# Altium PCB Плата.PcbDoc (part 2 of 2)
Units mm, origin at the board's own origin, x right, y up, seen from the top; angles counter-clockwise.
Board outline 114.75 x 89.87 mm, 2 copper layers (Top Layer, Bottom Layer); 69 components, 75 nets, 338 pads, 343 vias.
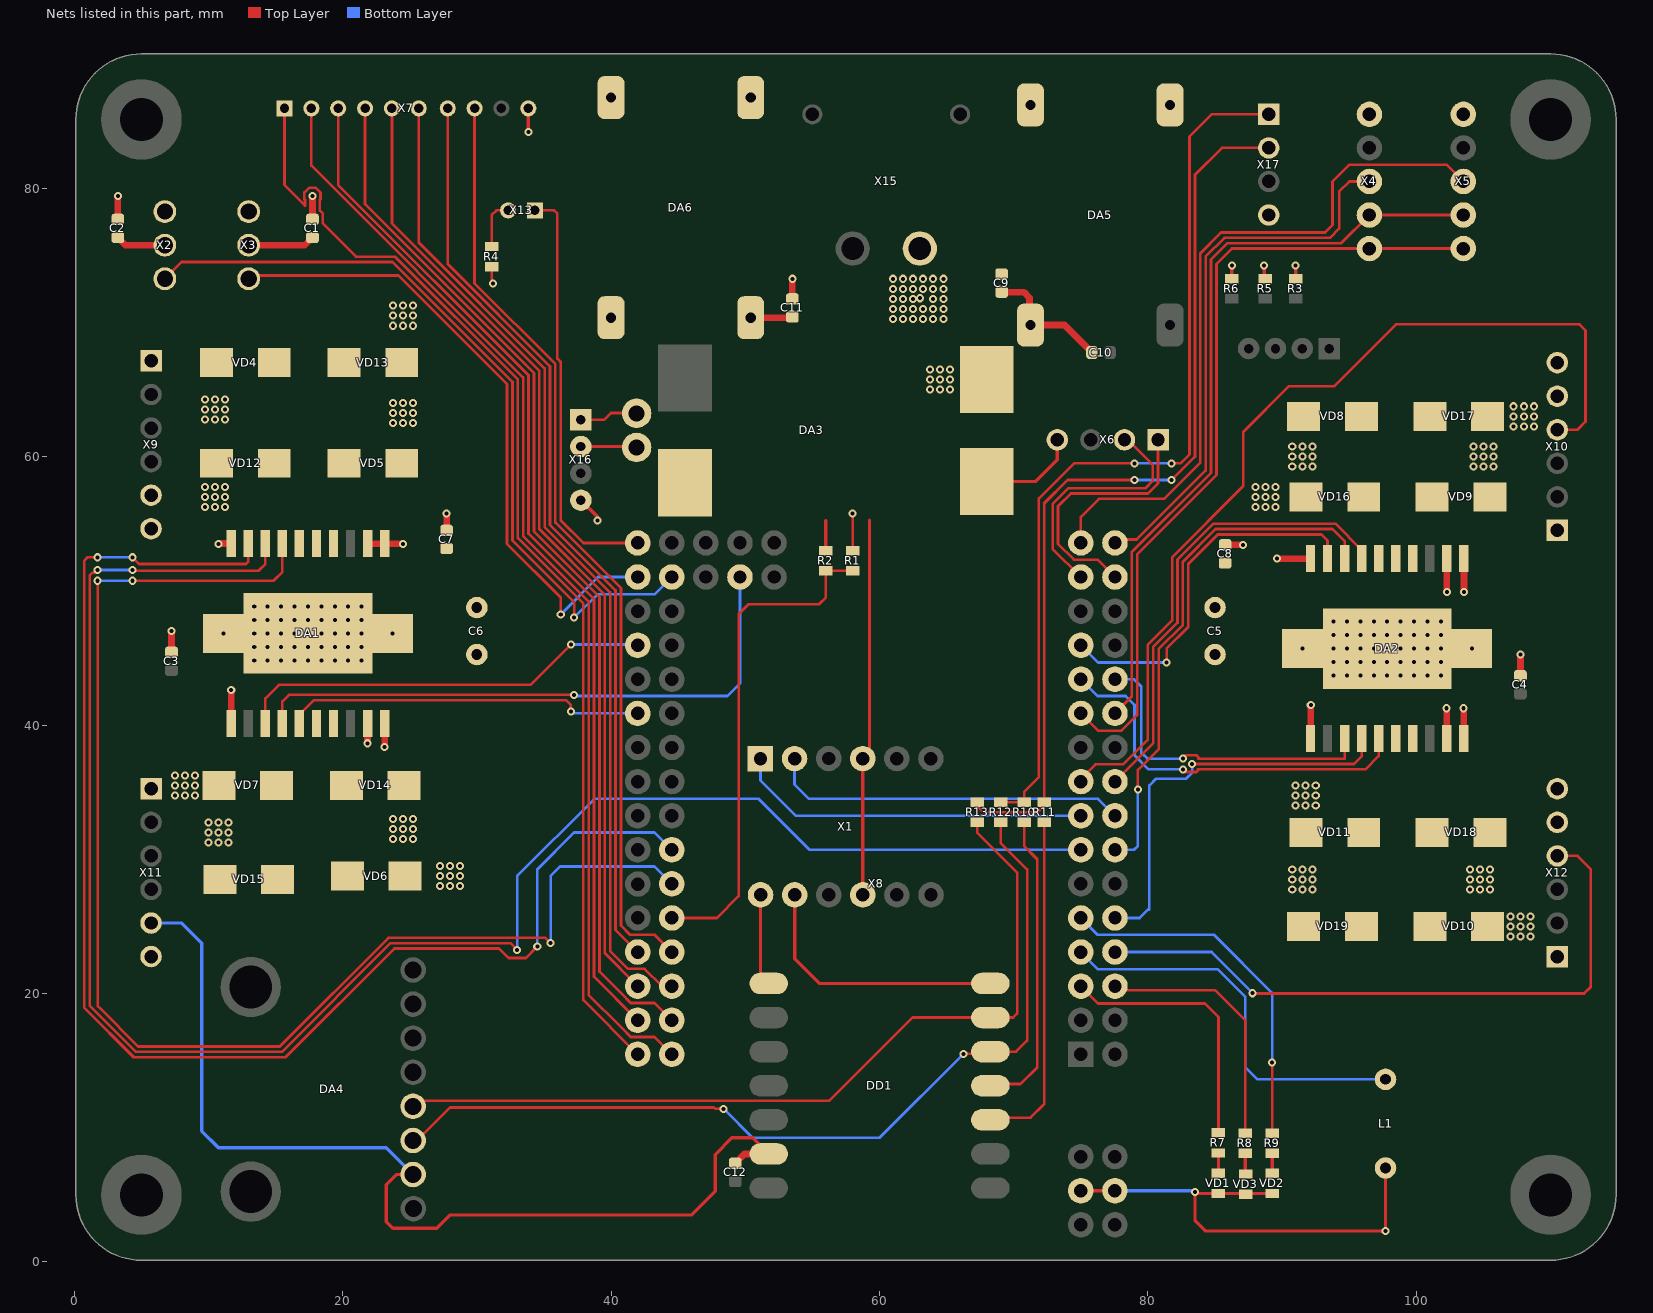
[diagram p2: the nets of this part, all layers, seen from the top]

## Via types
v1: diameter 0.6, hole 0.3, Top Layer to Bottom Layer, tented both sides, 342 vias
v2: diameter 0.6, hole 0.3, Top Layer to Bottom Layer, 1 vias

## Nets (pads, with @x,y where several pads share a name; then routed paths per layer and width w, separated by ;. In a path a pad name is that pad's centre, name@x,y a point inside that pad or via, vN(x,y) a via of type N, cw(c..) or ccw(c..) an arc to the next point about the centre after c; other vN are vias at no path point) (continued)
ENC2C: X8.17 X10.4 | length 70.4
  Top Layer w0.2: X8.17@75.002,35.787 75.002,36.002 76.077,37.077 78.143,37.077 79.992,38.926 79.992,45.989 81.8,47.797 81.8,52.497 87.1,57.797 87.1,61.833 90.517,65.25 93.886,65.25 98.486,69.85 112.15,69.85 112.6,69.4 112.6,62.6 112,62 X10.4@110.502,62
ENC2D: X8.8 X12.4 | length 48.6
  Top Layer w0.2: v1(87.787,20.018) 87.805,20 112.5,20 113,20.5 113,29.25 112,30.25 X12.4@110.502,30.25
  Bottom Layer w0.2: X8.8@77.542,23.087 84.747,23.087 87.787,20.047 v1(87.787,20.018)
GND: C1.2 C2.2 C3.2 C4.2 C5.2 C6.2 C7.1 C8.1 C9.1 C10.1 C11.1 C12.1 DA1.1 DA1.2 DA1.10 DA1.11 DA1.19 DA1.20 DA2.1 DA2.2 DA2.10 DA2.11 DA2.19 DA2.20 DA3.3 DA4.2 DA5.1 DA5.4 DA6.1 DA6.4 DD1.13 L1.2 R2.2 R3.1 R4.2 R5.1 R6.1 VD1.2 VD2.2 VD3.2 VD6.2 VD7.2 VD10.2 VD11.2 VD12.2 VD13.2 VD16.2 VD17.2 X1.4 X1.10 X2.3 X3.3 X4.5 X5.5 X6.4 X7.10 X8.73 X8.74 X9.5 X10.5 X11.5 X12.5 X15.2 X16.4 X17.4 | length 202.7
  Top Layer w0.2: R4.2@31.1,74.15 31.1,73 v1(31.2,72.9)
  Top Layer w0.25: DA4.2@25.25,6.51 24.01,6.51 23.25,5.75 23.25,3 23.75,2.5 27,2.5 28,3.5 46,3.5 47.75,5.25 47.75,8 49,9.25 50.544,9.25 DD1.13@51.747,8.047 ; v1(33.83,84.2) X7.10@33.83,85.95 ; X16.4@37.75,56.75 39,55.5 v2(39,55.25) ; R2.2@56,53 56,55.238 ; X1.10@58.755,27.345 58.755,37.495 X1.4@58.75,37.5 59.25,38 59.25,55.25 ; DA3.3@68,58.15 71.65,58.15 73.25,59.75 X6.4@73.25,61.25 ; DA5.4@71.175,69.875 DA5.4@71.25,69.8 ; X8.74@74.997,5.307 X8.73@77.537,5.307 ; v1@83.5,5.1 83.5,3.1 84.3,2.3 v1(97.7,2.3) L1.2@97.7,7 ; v1(83.5,5.2) 83.6,5.1 VD1.2@85.25,5.1 VD2.2@89.25,5.1 ; R6.1@86.25,73.25 v1(86.25,74.25) ; R5.1@88.658,73.242 v1(88.658,74.242) ; R3.1@91,73.25 v1(91,74.25)
  Top Layer w0.5: C2.2@3.25,77.675 v1(3.25,79.425) ; C3.2@7.25,45.425 v1(7.25,47) ; v1(10.75,53.5) 10.773,53.523 DA1.10@11.699,53.523 ; DA1.11@11.699,40.123 v1(11.699,42.623) ; C1.2@17.75,77.675 v1(17.75,79.425) ; v1(21.859,38.641) DA1.19@21.859,40.123 ; DA1.2@21.859,53.523 21.882,53.5 v1(24.5,53.5) ; v1(23.129,38.379) DA1.20@23.129,40.123 ; C7.1@27.75,54.5 v1(27.75,55.75) ; C12.1@49.25,7.35 49.947,8.047 DD1.13@51.747,8.047 ; C11.1@53.5,71.75 v1(53.5,73.25) ; C9.1@69.1,72.25 70.75,72.25 71.175,71.825 DA5.4@71.175,69.875 ; DA5.4@71.25,69.8 73.775,69.8 C10.1@75.825,67.75 ; C8.1@85.75,53.425 v1(87.075,53.425) ; v1(89.61,52.4) DA2.10@92.11,52.4 ; DA2.11@92.13,39 v1(92.13,41.5) ; DA2.19@102.25,39 102.26,39.01 102.26,41.24 v1(102.25,41.25) ; v1(102.27,49.9) DA2.2@102.27,52.4 ; DA2.20@103.5,39 103.519,39.019 103.519,41.231 v1(103.5,41.25) ; v1(103.54,49.9) DA2.1@103.54,52.4 ; C4.2@107.75,43.675 v1(107.75,45.25)
  Bottom Layer w0.25: X11.5@5.725,25.25 8,25.25 9.5,23.75 9.5,9.75 10.75,8.5 23.26,8.5 DA4.2@25.25,6.51 ; X8.73@77.537,5.307 83.393,5.307 v1(83.5,5.2)
  other v1: 107,24.25 107.75,24.25 108.5,24.25 107,25 107.75,25 108.5,25 107,25.75 107.75,25.75 108.5,25.75 27.25,28 28,28 28.75,28 27.25,28.75 28,28.75 28.75,28.75 27.25,29.5 28,29.5 28.75,29.5 91,34 91.75,34 92.5,34 7.5,34.75 8.25,34.75 9,34.75 91,34.75 91.75,34.75 92.5,34.75 7.5,35.5 8.25,35.5 9,35.5 91,35.5 91.75,35.5 92.5,35.5 7.5,36.25 8.25,36.25 9,36.25 93.825,43.7 94.825,43.7 95.825,43.7 96.825,43.7 97.825,43.7 98.825,43.7 99.825,43.7 100.825,43.7 101.825,43.7 93.825,44.7 94.825,44.7 95.825,44.7 96.825,44.7 97.825,44.7 98.825,44.7 99.825,44.7 100.825,44.7 101.825,44.7 13.414,44.823 14.414,44.823 15.413,44.823 16.414,44.823 17.414,44.823 18.414,44.823 19.414,44.823 20.413,44.823 21.414,44.823 91.525,45.7 93.825,45.7 94.825,45.7 95.825,45.7 96.825,45.7 97.825,45.7 98.825,45.7 99.825,45.7 100.825,45.7 101.825,45.7 104.125,45.7 13.414,45.823 14.414,45.823 15.413,45.823 16.414,45.823 17.414,45.823 18.414,45.823 19.414,45.823 20.413,45.823 21.414,45.823 93.825,46.7 94.825,46.7 95.825,46.7 96.825,46.7 97.825,46.7 98.825,46.7 99.825,46.7 100.825,46.7 101.825,46.7 11.114,46.823 13.414,46.823 14.414,46.823 15.413,46.823 16.414,46.823 17.414,46.823 18.414,46.823 19.414,46.823 20.413,46.823 21.414,46.823 23.714,46.823 93.825,47.7 94.825,47.7 95.825,47.7 96.825,47.7 97.825,47.7 98.825,47.7 99.825,47.7 100.825,47.7 101.825,47.7 13.414,47.823 14.414,47.823 15.413,47.823 16.414,47.823 17.414,47.823 18.414,47.823 19.414,47.823 20.413,47.823 21.414,47.823 13.414,48.823 14.414,48.823 15.413,48.823 16.414,48.823 17.414,48.823 18.414,48.823 19.414,48.823 20.413,48.823 21.414,48.823 9.75,56.25 10.5,56.25 11.25,56.25 88,56.25 88.75,56.25 89.5,56.25 9.75,57 10.5,57 11.25,57 88,57 88.75,57 89.5,57 9.75,57.75 10.5,57.75 11.25,57.75 88.025,57.75 88.75,57.75 89.5,57.75 107.25,62.25 108,62.25 108.75,62.25 107.25,63 108,63 108.75,63 107.25,63.75 108,63.75 108.75,63.75 23.75,69.75 24.5,69.75 25.25,69.75 61,70.25 61.75,70.25 62.5,70.25 63.25,70.25 64,70.25 64.75,70.25 23.75,70.5 24.5,70.5 25.25,70.5 61,71 61.75,71 62.5,71 63.25,71 64,71 64.75,71 23.75,71.25 24.5,71.25 25.25,71.25 61,71.75 61.75,71.75 62.5,71.75 64,71.75 64.75,71.75 63,71.8 61,72.5 61.75,72.5 62.5,72.5 63.25,72.5 64,72.5 64.75,72.5 61,73.25 61.75,73.25 62.5,73.25 63.25,73.25 64,73.25 64.75,73.25
LED: X8.47 X13.1 | length 31.2
  Top Layer w0.2: X13.1@34.325,78.35 35.75,78.35 36,78.1 36,67.307 36.25,67.057 36.25,55.25 37.933,53.567 X8.47@41.982,53.567
LED1: R7.2 X8.5 | length 19.8
  Top Layer w0.2: X8.5@75.002,20.547 76.292,19.257 84.243,19.257 85.25,18.25 R7.2@85.25,9.616
LED2: R8.2 X8.6 | length 19.2
  Top Layer w0.2: X8.6@77.542,20.547 77.839,20.25 85,20.25 87.25,18 87.25,10.839 R8.2@87.25,9.6
LED3: R9.2 X8.9 | length 27
  Top Layer w0.2: R9.2@89.25,9.6 v1(89.25,14.85)
  Bottom Layer w0.2: X8.9@75.002,25.627 76.252,24.377 84.923,24.377 89.25,20.05 v1(89.25,14.85)
LSesn1: X7.1 X8.55 | length 86.1
  Top Layer w0.2: X7.1@15.67,85.95 15.67,80.23 17.2,78.7 17.2,79.126 17.15,79.176 17.15,79.674 17.501,80.025 17.999,80.025 18.35,79.674 18.35,79.176 18.3,79.126 18.3,78.325 18.525,78.1 18.525,77.375 21,74.9 23.881,74.9 33.05,65.731 33.05,53.925 37.932,49.043 37.932,19.517 X8.55@41.982,15.467
LSesn2: X7.2 X8.56 | length 82.6
  Top Layer w0.2: X7.2@17.67,85.95 17.67,81.677 33.45,65.897 33.45,54.09 38.332,49.208 38.332,19.889 40.732,17.489 41.464,16.757 43.232,16.757 X8.56@44.522,15.467
LSesn3: X7.3 X8.57 | length 77.2
  Top Layer w0.2: X7.3@19.67,85.95 19.67,80.243 33.85,66.063 33.85,54.256 38.732,49.374 38.732,21.257 X8.57@41.982,18.007
LSesn4: X7.4 X8.58 | length 78.4
  Top Layer w0.2: X7.4@21.67,85.95 21.67,78.808 34.25,66.228 34.25,54.422 39.132,49.54 39.132,21.629 40.732,20.029 41.464,19.297 43.232,19.297 X8.58@44.522,18.007
LSesn5: X7.5 X8.59 | length 73
  Top Layer w0.2: X7.5@23.67,85.95 23.67,77.374 34.65,66.394 34.65,54.587 39.532,49.705 39.532,22.997 X8.59@41.982,20.547
LSesn6: X7.6 X8.60 | length 74.4
  Top Layer w0.2: X7.6@25.67,85.95 25.67,75.94 35.05,66.56 35.05,54.753 39.932,49.871 39.932,23.163 41.258,21.837 42.5,21.837 43.79,20.547 X8.60@44.522,20.547
LSesn7: X7.7 X8.61 | length 68.7
  Top Layer w0.2: X7.7@27.83,85.95 27.83,74.345 35.45,66.725 35.45,54.919 40.332,50.037 40.332,24.737 X8.61@41.982,23.087
LSesn8: X7.8 X8.62 | length 70
  Top Layer w0.2: X7.8@29.83,85.95 29.83,72.911 35.85,66.891 35.85,55.084 40.732,50.202 40.732,25.067 41.422,24.377 43.232,24.377 X8.62@44.522,23.087
MOT1A: DA1.4 VD5.2 VD13.1 X9.1
MOT1B: DA1.16 VD7.1 VD15.2 X11.1
MOT1C: DA2.4 VD9.2 VD17.1 X10.1
MOT1D: DA2.16 VD11.1 VD19.2 X12.1
MOT2A: DA1.5 VD4.2 VD12.1 X9.6
MOT2B: DA1.17 VD6.1 VD14.2 X11.6
MOT2C: DA2.5 VD8.2 VD16.1 X10.6
MOT2D: DA2.17 VD10.1 VD18.2 X12.6
MotEn1A: DA1.8 X8.13 | length 135.4
  Top Layer w0.2: v1(1.75,51.55) 1.75,51.5 1.6,51.35 1.35,51.35 1.15,51.15 1.15,19.1 4.6,15.65 15.478,15.65 23.578,23.75 32.5,23.75 v1(33,23.25) ; v1(4.35,51.55) 4.4,51.5 13.75,51.5 14.239,51.989 DA1.8@14.239,53.523
  Bottom Layer w0.2: v1(1.75,51.55) v1(4.35,51.55) ; v1(33,23.25) 33,28.75 38.75,34.5 51,34.5 54.793,30.707 X8.13@75.002,30.707
MotEn1B: DA2.8 X8.14 | length 39.1
  Top Layer w0.2: v1(79.25,35.187) 79.25,36.65 80.792,38.192 80.792,45.658 82.6,47.466 82.6,52.166 85.034,54.6 93.75,54.6 94.65,53.7 DA2.8@94.65,52.4
  Bottom Layer w0.2: X8.14@77.542,30.707 78.957,30.707 79.25,31 v1(79.25,35.187)
MotEn2A: DA1.14 X8.52 | length 44.3
  Top Layer w0.2: DA1.14@15.509,40.123 15.509,41.759 16,42.25 v1(37.25,42.25)
  Bottom Layer w0.2: v1(37.25,42.25) 37.343,42.157 48.657,42.157 49.602,43.102 X8.52@49.602,51.027
MotEn2B: DA2.14 X8.10 | length 30.5
  Top Layer w0.2: v1@83.193,37.1 95.35,37.1 95.92,37.67 DA2.14@95.92,39
  Bottom Layer w0.2: X8.10@77.542,25.627 79.377,25.627 80,26.25 ; 80.1,26.25 80.1,35.5 80.6,36 82.85,36 83.293,36.443 v1(83.293,37.1)
MotIn1A: DA1.7 X8.66 | length 101.2
  Top Layer w0.2: v1(1.75,50.75) 1.75,19.066 1.95,18.866 4.766,16.05 15.313,16.05 23.413,24.15 35.1,24.15 v1(35.5,23.75) ; v1(4.35,50.75) 14.85,50.75 15.509,51.409 DA1.7@15.509,53.523
  Bottom Layer w0.2: v1(1.75,50.75) v1(4.35,50.75) ; v1(35.5,23.75) 35.5,28.75 36.207,29.457 43.232,29.457 X8.66@44.522,28.167
MotIn1B: DA2.7 X8.18 | length 34.8
  Top Layer w0.2: X8.18@77.542,35.787 80.392,38.637 80.392,45.823 82.2,47.631 82.2,52.331 84.869,55 93.97,55 95.92,53.05 DA2.7@95.92,52.4
MotIn2A: DA1.9 X8.68 | length 104
  Top Layer w0.2: v1(1.75,52.5) 1,52.5 0.75,52.25 0.75,18.934 4.434,15.25 15.75,15.25 23.85,23.35 31.65,23.35 32.35,22.65 33.65,22.65 v1(34.5,23.5) ; v1(4.35,52.5) 4.35,52.49 4.84,52 12.8,52 12.969,52.168 DA1.9@12.969,53.523
  Bottom Layer w0.2: v1(1.75,52.5) v1(4.35,52.5) ; v1(34.5,23.5) 34.5,29.25 37.247,31.997 43.232,31.997 X8.68@44.522,30.707
MotIn2B: DA2.9 X8.25 | length 27.8
  Top Layer w0.2: v1(81.392,44.661) 81.392,45.692 83,47.3 83,52 85.2,54.2 92.934,54.2 93.38,53.754 DA2.9@93.38,52.4
  Bottom Layer w0.2: X8.25@75.002,45.947 76.292,44.657 81.243,44.657 81.3,44.6 81.331,44.6 v1(81.392,44.661)
MotIn3A: DA1.13 X8.41 | length 31.3
  Top Layer w0.2: DA1.13@14.239,40.123 14.239,41.988 15.25,43 34,43 v1(37,46)
  Bottom Layer w0.2: v1(37,46) 41.929,46 X8.41@41.982,45.947
MotIn3B: DA2.13 X8.24 | length 24.2
  Top Layer w0.2: v1(82.6,37.5) 82.85,37.75 83.6,37.75 83.85,37.5 ; 83.75,37.5 94.65,37.5 DA2.13@94.65,39
  Bottom Layer w0.2: X8.24@77.542,43.407 78.953,43.407 79.5,42.86 79.5,37.86 ; 79.6,37.86 79.96,37.5 v1(82.6,37.5)
MotIn4A: DA1.15 X8.37 | length 27
  Top Layer w0.2: DA1.15@16.779,40.123 16.779,40.773 17.855,41.85 36.65,41.85 37,41.5 v1(37,41)
  Bottom Layer w0.2: v1(37,41) 37.133,40.867 X8.37@41.982,40.867
MotIn4B: DA2.15 X8.23 | length 29
  Top Layer w0.2: v1(82.6,36.7) 82.8,36.5 83.6,36.5 83.8,36.7 ; 83.7,36.7 96.2,36.7 97.19,37.69 DA2.15@97.19,39
  Bottom Layer w0.2: X8.23@75.002,43.407 76.252,42.157 78.343,42.157 79,41.5 79,37.75 80.05,36.7 ; 80.15,36.7 v1(82.6,36.7)
NetDA3_4: DA3.4 X16.1 | length 4.4
  Top Layer w0.2: X16.1@37.75,62.75 39.5,62.75 40,63.25 41.87,63.25 DA3.4@41.9,63.22
NetDA3_5: DA3.5 X16.2 | length 4.2
  Top Layer w0.2: X16.2@37.75,60.75 41.83,60.75 DA3.5@41.9,60.68
NetR4_1: R4.1 X13.2 | length 3.7
  Top Layer w0.2: R4.1@31.1,75.65 31.1,78 31.45,78.35 X13.2@32.325,78.35
NetR7_1: R7.1 VD1.1 | length 1.5
  Top Layer w0.25: VD1.1@85.25,6.6 R7.1@85.25,8.116
NetR8_1: R8.1 VD3.1 | length 1.5
  Top Layer w0.25: VD3.1@87.25,6.6 R8.1@87.25,8.1
NetR9_1: R9.1 VD2.1 | length 1.5
  Top Layer w0.25: VD2.1@89.25,6.6 R9.1@89.25,8.1
NetR10_1: R10.1 R12.1 X17.1 | length 67.7
  Top Layer w0.2: R12.1@69.023,34.25 R10.1@70.773,34.25 70.773,35.023 71.873,36.123 71.873,56.873 74.5,59.5 v1(79,59.5) ; v1(81.75,59.5) 82.434,59.5 83.1,60.166 83.1,83.85 84.75,85.5 X17.1@89,85.5
  Bottom Layer w0.2: v1(79,59.5) v1(81.75,59.5)
NetR11_1: R11.1 R13.1 X17.2 | length 68.2
  Top Layer w0.2: R13.1@67.273,34.25 67.273,33.977 67.75,33.5 71.75,33.5 72.273,34.023 R11.1@72.273,34.25 72.273,56.523 74,58.25 v1(79,58.25) ; v1@81.758,58.258 83.5,60 83.5,81 85.5,83 X17.2@89,83
  Bottom Layer w0.2: v1(79,58.25) 79.003,58.253 81.74,58.253 v1(81.743,58.257)
RX: X1.2 X8.16 | length 26.8
  Bottom Layer w0.2: X1.2@53.67,37.5 53.67,35.58 54.75,34.5 76.289,34.5 X8.16@77.542,33.247
RX_nRF: DD1.8 X1.7 | length 6.9
  Top Layer w0.25: X1.7@51.135,27.345 51.135,21.359 DD1.8@51.747,20.747
SCL: X4.2 X5.2 X8.22 | length 57
  Top Layer w0.2: X8.22@77.542,40.867 78.792,42.117 78.792,52.883 84.7,58.791 84.7,74.677 85.923,75.9 94.4,75.9 X4.2@96.5,78 X5.2@103.5,78
SCL_nRF: DA4.4 DD1.6 R13.2 | length 63.3
  Top Layer w0.2: DA4.4@25.25,11.59 25.66,12 56.25,12 62.457,18.207 DD1.6@68.257,18.207 69.957,18.207 70.25,18.5 70.25,29 67.273,31.977 R13.2@67.273,32.75
SCL_Soft: X6.2 X8.29 | length 18.6
  Top Layer w0.2: X8.29@75.002,51.027 72.9,53.129 72.9,56.466 74.084,57.65 79.834,57.65 80.35,58.166 80.35,59.4 78.5,61.25 X6.2@78.25,61.25
SDA: X4.1 X5.1 X8.21 | length 60.1
  Top Layer w0.2: X8.21@75.002,40.867 76.292,39.577 78.02,39.577 79.192,40.749 79.192,52.717 85.1,58.625 85.1,74.35 86.25,75.5 X4.1@96.5,75.5 X5.1@103.5,75.5
SDA_nRF: DA4.3 DD1.5 R12.2 | length 68.2
  Top Layer w0.2: DA4.3@25.25,9.05 25.55,9.05 28,11.5 47.666,11.5 47.766,11.4 v1(48.366,11.4) ; v1(66.25,15.5) 67.09,15.5 67.59,15 DD1.5@68.257,15.667 70.167,15.667 71,16.5 71,29.25 69.023,31.227 R12.2@69.023,32.75
  Bottom Layer w0.2: v1(48.366,11.4) 48.397,11.4 50.547,9.25 60,9.25 v1(66.25,15.5)
SDA_Soft: X6.1 X8.30 | length 19.5
  Top Layer w0.2: X8.30@77.542,51.027 76.252,52.317 74.484,52.317 73.3,53.501 73.3,56.3 74.25,57.25 80,57.25 80.75,58 X6.1@80.75,61.25
ServoA: X2.1 X8.46 | length 58.1
  Top Layer w0.2: X2.1@6.75,73.25 8,74.5 23.716,74.5 32.65,65.566 32.65,53.759 37.25,49.159 v1(37.25,48)
  Bottom Layer w0.2: v1(37.25,48) 38.987,49.737 43.232,49.737 X8.46@44.522,51.027
ServoB: X3.1 X8.45 | length 48.4
  Top Layer w0.2: X3.1@13,73.25 13.25,73.5 24.15,73.5 32.25,65.4 32.25,53.5 36.25,49.5 v1(36.25,48.25)
  Bottom Layer w0.2: v1(36.25,48.25) 39.027,51.027 X8.45@41.982,51.027
SoftRX_nRF: DD1.4 R10.2 | length 22.7
  Top Layer w0.2: DD1.4@68.257,13.127 68.38,13.25 70.5,13.25 71.75,14.5 71.75,30 70.773,30.977 R10.2@70.773,32.75
SoftTX_nRF: DD1.3 R11.2 | length 25.5
  Top Layer w0.2: DD1.3@68.257,10.587 68.42,10.75 71.25,10.75 72.273,11.773 R11.2@72.273,32.75
Sound: L1.1 X8.7 | length 29.5
  Bottom Layer w0.2: X8.7@75.002,23.087 76.292,21.797 85.203,21.797 87.25,19.75 87.25,14.5 88.15,13.6 L1.1@97.5,13.6
TX: X1.1 X8.15 | length 26.6
  Bottom Layer w0.2: X1.1@51.13,37.5 51.13,35.87 53.753,33.247 X8.15@75.002,33.247
TX_nRF: DD1.7 X1.8 | length 20.1
  Top Layer w0.25: X1.8@53.675,27.345 53.675,22.575 55.503,20.747 DD1.7@68.257,20.747
Vcc: C5.1 C6.1 C7.2 C8.2 C9.2 DA1.6 DA2.6 DA3.2 DA5.2 DA6.2 R1.1 VD4.1 VD5.1 VD8.1 VD9.1 VD14.1 VD15.1 VD18.1 VD19.1 | length 3.1
  Top Layer w0.2: R1.1@58,53 v1(58,55.75)
  Top Layer w0.5: VD18.1@105.25,31.775 VD18.1@105.475,32
  other v1: 90.75,27.75 91.5,27.75 92.25,27.75 104,27.75 104.75,27.75 105.5,27.75 90.75,28.5 91.5,28.5 92.25,28.5 104,28.5 104.75,28.5 105.5,28.5 90.75,29.25 91.5,29.25 92.25,29.25 104,29.25 104.75,29.25 105.5,29.25 10,31.25 10.75,31.25 11.5,31.25 23.75,31.5 24.5,31.5 25.25,31.5 10,32 10.75,32 11.5,32 23.75,32.25 24.5,32.25 25.25,32.25 10,32.75 10.75,32.75 11.5,32.75 23.75,33 24.5,33 25.25,33 90.75,59.25 91.5,59.25 92.25,59.25 104.25,59.25 105,59.25 105.75,59.25 90.75,60 91.5,60 92.25,60 104.25,60 105,60 105.75,60 90.75,60.75 91.5,60.75 92.25,60.75 104.25,60.75 105,60.75 105.75,60.75 23.75,62.5 24.5,62.5 25.25,62.5 9.75,62.75 10.5,62.75 11.25,62.75 23.75,63.25 24.5,63.25 25.25,63.25 9.75,63.5 10.5,63.5 11.25,63.5 23.75,64 24.5,64 25.25,64 9.75,64.25 10.5,64.25 11.25,64.25 63.75,65 64.5,65 65.25,65 63.75,65.75 64.5,65.75 65.25,65.75 63.75,66.5 64.5,66.5 65.25,66.5
Voltage: R1.2 R2.1 X8.64 | length 37.7
  Top Layer w0.2: X8.64@44.522,25.627 47.877,25.627 49.505,27.255 49.505,48.255 50.25,49 55.5,49 56,49.5 R2.1@56,51.5 R1.2@58,51.5
Vs: C1.1 C2.1 C11.2 DA6.3 X2.2 X3.2 | length 11.8
  Top Layer w0.5: C2.1@3.25,76.325 3.825,75.75 X2.2@6.75,75.75 ; X3.2@13,75.75 17.175,75.75 C1.1@17.75,76.325 ; DA6.3@50.4,70.35 53.45,70.35 C11.2@53.5,70.4
XSHUT1: X4.3 X8.32 | length 41.1
  Top Layer w0.2: X8.32@77.542,53.567 77.795,53.82 79.163,53.82 84.3,58.957 84.3,74.914 85.686,76.3 93.55,76.3 94.25,77 94.25,79.75 95,80.5 X4.3@96.5,80.5
XSHUT2: X5.3 X8.31 | length 52.9
  Top Layer w0.2: X8.31@75.002,53.567 75.002,55.498 75,55.5 76.35,56.85 81.185,56.85 83.9,59.565 83.9,75.15 85.45,76.7 93.2,76.7 93.75,77.25 93.75,80.5 95,81.75 102.25,81.75 X5.3@103.5,80.5
pads on no net: DA1.3 DA1.18 DA2.3 DA2.18 DA4.5 DA4.6 DA4.7 DA4.8 DA4.9 DA4.10 DD1.1 DD1.2 DD1.9 DD1.10 DD1.11 X1.5 X1.6 X1.11 X1.12 X8.1 X8.2 X8.11 X8.12 X8.33 X8.34 X8.35 X8.36 X8.38 X8.39 X8.40 X8.42 X8.43 X8.44 X8.48 X8.49 X8.50 X8.51 X8.53 X8.54 X8.63 X8.69 X8.70 X8.71 X8.72 X15.3 X15.4

## Polygon pours and split planes (outlines as drawn)
+3S on Top Layer "+3S_L01_P034" (solid, pour order 34): 60.25,73.25 59,72 59,63.5 58,62.5 42.25,62.5 42,62.75 42,69 42.25,69.25 55.5,69.25 55.75,69.5 55.75,77 56.75,78 59.5,78 60.25,77.25
GND on Top Layer "GND_L01_P059" (solid, pour order 59): 65.75,77.25 65.75,69.5 64.75,68.5 63.75,68.5 62.5,67.25 62.5,62 63.5,61 70,61 70.5,60.5 70.5,55.75 70,55.25 69.95,55.2 43.55,55.2 43,55.75 43,60.5 43.5,61 58.25,61 59.25,62 59.25,72.25 60.25,73.25 60.25,77.25 61,78 65,78
Vcc on Top Layer "VCC_L01_P035" (solid, pour order 35): 63.25,63 62.75,63.5 62.75,67.5 63.75,68.5 64.75,68.5 65.75,69.5 65.75,78.75 64.75,79.75 39.75,79.75 38.25,81.25 38.25,88.5 39,89.25 43,89.25 43.75,88.5 43.75,85.25 44.75,84.25 68.75,84.25 69.5,85 69.5,88.5 70,89 72.583,89 73,88.375 73,82 70.25,79.25 70.25,63.75 69.5,63
Vcc on Top Layer "VCC_L01_P047" (solid, pour order 47): 85,51.75 85,52.5 86.5,52.5 86.5,51.5 87,51 96,51 96.5,51.5 96.5,53.75 98,53.75 98,51.25 95.75,49 88,49 86.25,47.25 84.25,47.25 83.5,48 83.5,50.25
GND on Top Layer "GND_L01_P045" (solid, pour order 45): 93.425,55.925 93,55.5 88,55.5 87.5,56 87.5,58 88,58.5 93,58.5 93.425,58.075
MOT2C on Top Layer "MOT2C_L01_P025" (solid, pour order 25): 97.25,54.75 97.75,54.25 97.75,51 99,51 99,65.5 99.5,66 109,66 109.25,65.75 111.5,65.75 111.75,66 111.75,68.25 111.25,68.75 97.75,68.75 94.5,65.5 94.5,55 94.75,54.75
MOT2D on Top Layer "MOT2D_L01_P022" (solid, pour order 22): 103.15,32.9 104,33.75 111.5,33.75 112,34.25 112,36.5 111.5,37 101,37 100.5,37.5 100.5,40.5 99,40.5 99,24 99.55,23.525 102.525,23.525 103.15,24.15
GND on Top Layer "GND_L01_P041" (solid, pour order 41): 103.5,26.25 103.75,26.5 108.75,26.5 109,26.25 109,23.75 108.75,23.5 103.75,23.5 103.5,23.75
MOT2A on Top Layer "MOT2A_L01_P032" (solid, pour order 32): 18.75,52 17.25,52 17.25,54.75 11,54.75 9.75,53.5 4.25,53.5 3.75,54 3.75,55.75 4.25,56.25 13.25,56.25 13.25,68.25 14,69 16.25,69 16.75,68.5 16.75,56.5 17.25,56 18.25,56 18.75,55.5
Vcc on Top Layer "VCC_L01_P055" (solid, pour order 55): 26.5,52 27,52.5 27,53.575 28.5,53.575 28.5,52.5 29,52 31,52 31.5,51.5 31.5,47.5 31,47 29,47 28.5,47.5 28.5,49.5 28,50 16.25,50 16,50.25 16,54.75 16.027,54.723 17.499,54.723 17.499,52.251 17.75,52
MOT2B on Top Layer "MOT2B_L01_P029" (solid, pour order 29): 21.25,38.75 22.5,37.5 22.5,26.5 17.25,21.25 4.5,21.25 4,21.75 4,23.5 4.5,24 7.25,24 9.75,26.5 16.5,26.5 18.75,28.75 18.75,41.5 20,41.5 20,38.75
GND on Top Layer "GND_L01_P040" (solid, pour order 40): 93,36.5 93.5,36 93.5,30.5 93.25,30.25 90.25,30.25 90,30.5 90,36 90.5,36.5
MOT1B on Top Layer "MOT1B_L01_P028" (solid, pour order 28): 12.751,33.577 13.251,33.077 13.251,26.827 13.751,26.327 16.751,26.327 18.501,28.077 18.501,41.327 17.501,41.327 17.501,38.827 5.001,38.827 4.251,38.077 4.251,34.077 4.751,33.577
MOT1A on Top Layer "MOT1A_L01_P033" (solid, pour order 33): 4.5,65.75 4,66.25 4,71.5 4.5,72 22,72 22.5,71.5 22.5,54.75 20,54.75 20,52 18.75,52 18.75,55.5 18.25,56 18.25,68.75 17.75,69.25 8.75,69.25 8.25,68.75 8.25,66.5 7.5,65.75
GND on Top Layer "GND_L01_P053" (solid, pour order 53): 29.225,30.275 29.4,30.1 29.4,27.525 29.15,27.275 23.4,27.275 23.15,27.525 23.15,30.025 23.4,30.275
Vcc on Top Layer "VCC_L01_P052" (solid, pour order 52): 9.325,33.075 9.5,33.25 12.075,33.25 12.325,33 12.325,27.25 12.075,27 9.575,27 9.325,27.25
Vcc on Top Layer "VCC_L01_P051" (solid, pour order 51): 22.975,36.825 23.15,37 25.725,37 25.975,36.75 25.975,31 25.725,30.75 23.225,30.75 22.975,31
GND on Top Layer "GND_L01_P050" (solid, pour order 50): 22.9,71.825 23.075,72 25.65,72 25.9,71.75 25.9,66 25.65,65.75 23.15,65.75 22.9,66
Vcc on Top Layer "VCC_L01_P049" (solid, pour order 49): 22.75,58.5 22.75,64 23.25,64.5 25.75,64.5 26.25,64 26.25,58.75 25.5,58 23.25,58
Vcc on Top Layer "VCC_L01_P048" (solid, pour order 48): 9,68.325 9.175,68.5 11.75,68.5 12,68.25 12,62.5 11.75,62.25 9.25,62.25 9,62.5
GND on Top Layer "GND_L01_P044" (solid, pour order 44): 103,64.25 103.5,64.75 109,64.75 109.502,64.248 109.502,61.752 109,61.25 103.5,61.25 103,61.75
Vcc on Top Layer "VCC_L01_P043" (solid, pour order 43): 92.75,58.75 93.5,59.5 93.5,64 93,64.5 90.25,64.5 89.75,64 89.75,59.5 90.5,58.75
Vcc on Top Layer "VCC_L01_P039" (solid, pour order 39): 103.962,33.5 103.75,33.288 103.75,29.75 103.5,29.5 103.5,27.25 103.75,27 105.704,27 106,27.296 106,29.5 107.25,30.75 107.25,33.266 107.016,33.5
Vcc on Top Layer "VCC_L01_P036" (solid, pour order 36): 92.75,23.5 93.25,24 93.25,29.75 93,30 90.325,30 90,29.675 90,24 90.5,23.5
MOT1C on Top Layer "MOT1C_L01_P024" (solid, pour order 24): 113.25,53 105,53 104.246,53.748 100.998,53.748 100.5,53.25 100.5,51 99,51 99,65.25 99.5,65.75 102,65.75 102.5,65.25 102.5,56.25 103,55.75 113.25,55.75
MOT1D on Top Layer "MOT1D_L01_P023" (solid, pour order 23): 94.25,33.5 95,34.25 97.25,34.25 97.75,34.75 97.75,40.5 99,40.5 99,23.75 99.75,23 108.5,23 109,23.5 109,24 109.25,24.25 111.75,24.25 112.25,23.75 112.25,21.5 111.75,21 95.25,21 94.25,22 94.25,30.5
Vcc on Top Layer "VCC_L01_P013" (solid, pour order 13): 107.25,55.85 103.748,55.85 103.748,59.002 103.748,60.998 104.002,61.252 106.998,61.252 107.25,61
GND on Top Layer "GND_L01_P012" (solid, pour order 12): 12,56.25 11.5,55.75 9.543,55.75 9,56.293 9,60.825 9.175,61 11.75,61 12,60.75
GND on Top Layer "GND_L01_P011" (solid, pour order 11): 7.599,36.975 7.076,36.452 7.076,34.424 7.525,33.975 11.89,33.975 12.14,34.225 12.14,36.725 11.89,36.975
GND on Bottom Layer "BOTTOM_GND" (solid, remove dead copper, pour order 60): 5.002,0.127 cw(c5.002,5.002) 0.127,5.002 0.127,85.127 cw(c5.002,85.127) 5.002,90.002 110.002,90.002 cw(c110.002,85.127) 114.877,85.127 114.877,5.002 cw(c110.002,5.002) 110.002,0.127
Vcc on Bottom Layer "Vbat_Main" (solid, pour order 31): 59,56.25 59.25,56.5 78.25,56.5 79.5,55.25 79.5,27.75 81.25,26 85.913,26 86.913,27 89.5,27 90,26.5 90,24 90.5,23.5 92.75,23.5 93.25,24 93.25,26.25 94,27 105.704,27 106.25,27.546 106.25,29.75 107,30.5 107,33.25 106.75,33.5 104.25,33.5 104,33.25 104,30.75 103.25,30 86.5,30 86.5,42.25 85.25,43.5 85.25,47 86.3,47.846 86.096,57.096 87.75,58.75 106,58.75 106.5,59.25 106.5,60.75 106,61.25 86,61.25 86,63.5 84.5,65 79.5,65 78.5,66 78.5,67.25 76.75,69 63.25,69 62.5,68.25 62.5,65 8.75,65 8.75,61.75 29,61.75 29,47.75 30,46.75 30,43.75 29.5,43.25 29.5,40.25 27.25,38 27.25,33.5 9,33.5 9,30.75 29.25,30.75 30.25,29.75 33.5,29.75 36.5,32.75 36.5,54.5 38.5,56.5 56.75,56.5 57,56.25 57,55 57.25,54.75 58.75,54.75 59,55
Vs on Bottom Layer "VS_L02_P021" (solid, pour order 21): 48.75,69 49.115,68.544 51.794,68.544 52.25,69 52.25,76.25 51.5,77 5.5,77 5,76.5 5,75 5.5,74.5 47.75,74.5 48.75,73.5

## Silkscreen, mask and mechanical layers (free items; w line width, h text height)
Top Overlay:
  drawing of 174 lines, arcs and shapes, not listed
  text "31" at 97.588,88.563 h1.5
  text "30" at 104.527,88.563 h1.5
  text "S1" at 15.1,87.917 h1.52
  text "S2" at 17.1,87.917 h1.52
  text "S3" at 19.1,87.917 h1.52
  text "S4" at 21.1,87.917 h1.52
  text "S5" at 23,87.917 h1.52
  text "S6" at 25.1,87.917 h1.52
  text "S7" at 27.3,87.917 h1.52
  text "S8" at 29.2,87.917 h1.52
  text "+5В" at 30.7,87.917 h1.52
  text "GND" at 33,87.917 h1.52
  text "GND" at 9,86.117 h1.52
  text "D1" at 84,85.1 h1.52
  text "+5В" at 9.1,84.717 h1.52
  text "PWM" at 9.2,83.1 h1.52
  text "D2" at 84,82.5 h1.52
  text "ДАТЧИКИ ЛИНИИ" at 16.4,81.665 h1.5
  text "CЕРВО" at 10.713,80.765 h1.5
  text "CЕРВО" at 4.413,80.665 h1.5
  text "+5В" at 83.3,80.017 h1.52
  text "46" at 36.809,79.863 h1.5
  text "GND" at 107.2,78.917 h1.52
  text "+5В" at 107.2,77.617 h1.52
  text "GND" at 83,77.517 h1.52
  text "XSHUT" at 107.2,76.317 h1.52
  text "GND" at 28.74,75.936 h1.5 r90
  text "PIN" at 30.04,75.936 h1.5 r90
  text "LED" at 33.8,75.065 h1.5
  text "SCL" at 107.1,75.017 h1.52
  text "SDA" at 107.1,73.817 h1.52
  text "45" at 17,72.916 h1.5
  text "ПИТАНИЕ 3S" at 55.973,72.66 h1.5
  text "ДАТЧИКИ РАССТОЯНИЯ" at 92.973,71.536 h1.3
  text "VCC" at 56.536,71.26 h1.5
  text "GND" at 61.736,71.26 h1.5
  text "44" at 17,71.1 h1.5
  text "25" at 100.707,69.566 h1.5
  text "+5В" at 96.7,69.417 h1.52
  text "МОТОР ПЕРЕДНИЙ ПРАВЫЙ" at 106.56,69.422 h1.52 r270
  text "BTN3" at 96.7,68.217 h1.52
  text "26" at 100.71,67.766 h1.5
  text "BTN2" at 96.7,67 h1.52
  text "27" at 100.715,65.85 h1.5
  text "BTN1" at 96.7,65.8 h1.52
  text "OLED ДИСПЛЕЙ" at 70.686,64.76 h1.5
  text "ЭНКОДЕР" at 85.486,64.76 h1.5
  text "+5В" at 75.983,56.4 h1.52 r90
  text "GND" at 73.583,56.3 h1.52 r90
  text "SCL" at 78.683,56.3 h1.52 r90
  text "SDA" at 81.083,56.2 h1.52 r90
  text "ВКЛЮЧЕНИЕ" at 34.94,54.75 h1.5 r90
  text "МОТОР ПЕРЕДНИЙ ЛЕВЫЙ" at 2.24,52.156 h1.5 r90
  text "MOT+" at 1.8,47.717 h1.52
  text "MOT+" at 110.3,47.517 h1.52
  text "GND" at 1.8,46.517 h1.52
  text "GND" at 110.3,46.317 h1.52
  text "Enc2" at 1.8,45.317 h1.52
  text "Enc2" at 110.3,45.117 h1.52
  text "Enc1" at 1.8,44.117 h1.52
  text "Enc1" at 110.3,43.917 h1.52
  text "+5В" at 1.8,42.917 h1.52
  text "+5В" at 110.3,42.717 h1.52
  text "MOT-" at 1.8,41.817 h1.52
  text "MOT-" at 110.3,41.617 h1.52
  text "In1" at 28.805,40.5 h1.5
  text "65" at 32.955,40.5 h1.5
  text "In2" at 28.855,39 h1.5
  text "67" at 32.955,39 h1.5
  text "In1" at 80.15,38.5 h1.5
  text "17" at 84.3,38.5 h1.5
  text "МОТОР ЗАДНИЙ ПРАВЫЙ" at 106.56,37.722 h1.52 r270
  text "In3" at 28.855,37.4 h1.5
  text "40" at 32.955,37.4 h1.5
  text "In2" at 80.2,37 h1.5
  text "24" at 84.3,37 h1.5
  text "In4" at 28.855,35.8 h1.5
  text "36" at 32.955,35.8 h1.5
  text "I2C" at 67.5,35.516 h1.5
  text "UART" at 70,35.516 h1.5
  text "In3" at 80.2,35.4 h1.5
  text "23" at 84.3,35.4 h1.5
  text "En1" at 28.855,34.3 h1.5
  text "12" at 32.955,34.3 h1.5
  text "In4" at 80.2,33.8 h1.5
  text "22" at 84.3,33.8 h1.5
  text "En2" at 28.955,32.8 h1.5
  text "51" at 32.955,32.8 h1.5
  text "En1" at 80.2,32.3 h1.5
  text "19" at 84.3,32.3 h1.5
  text "Enc1" at 28.905,31.3 h1.5
  text "3" at 32.955,31.3 h1.5
  text "En2" at 80.3,30.8 h1.5
  text "9" at 84.3,30.8 h1.5
  text "Enc2" at 28.855,29.8 h1.5
  text "2" at 32.955,29.8 h1.5
  text "Enc1" at 80.25,29.3 h1.5
  text "19" at 84.3,29.3 h1.5
  text "Enc3" at 28.855,28.3 h1.5
  text "64" at 32.955,28.3 h1.5
  text "Enc2" at 80.2,27.8 h1.5
  text "16" at 84.3,27.8 h1.5
  text "Enc4" at 28.855,26.8 h1.5
  text "66" at 32.955,26.8 h1.5
  text "Enc3" at 80.2,26.3 h1.5
  text "18" at 84.3,26.3 h1.5
  text "Enc4" at 80.2,24.8 h1.5
  text "7" at 84.3,24.8 h1.5
  text "МОТОР ЗАДНИЙ ЛЕВЫЙ" at 2.24,20.178 h1.52 r90
  text "6" at 99.721,16.763 h1.5
  text "5" at 86.817,12.966 h1.5
  text "8" at 88.723,12.966 h1.5
  text "4" at 84.923,12.9 h1.5
Mechanical 1:
  the board outline again, w0.254